# Altium PCB cs301_Group5_rev1--4_holes.PcbDoc
Units mil, origin at the board's own origin, x right, y up, seen from the top; angles counter-clockwise.
Board outline 10825 x 6635 mil, 2 copper layers (Top Layer, Bottom Layer); 97 components, 47 nets, 326 pads, 0 vias.
Unrouted connection lines stored in the file: 63.
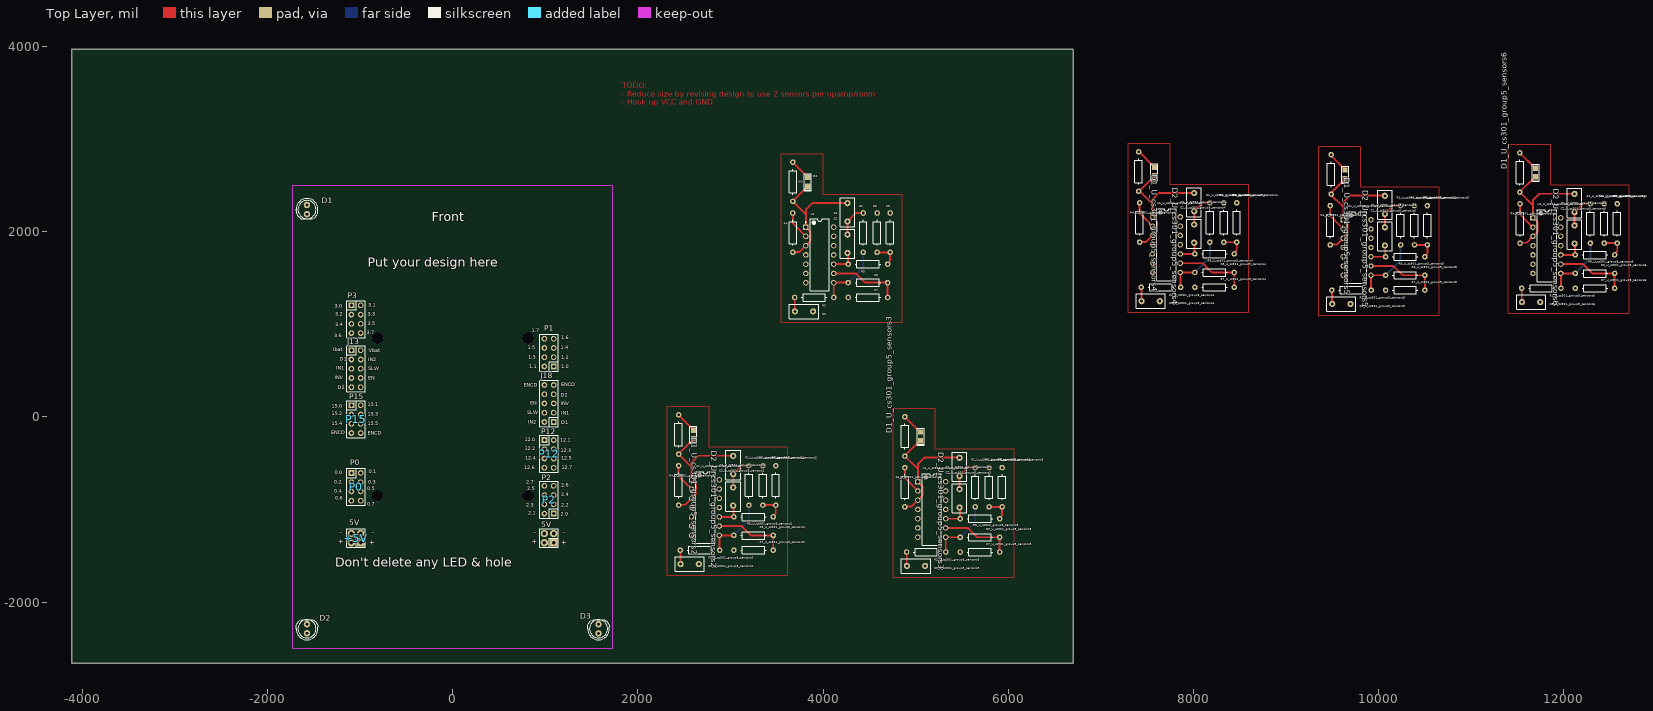
[diagram p0: Top Layer view]
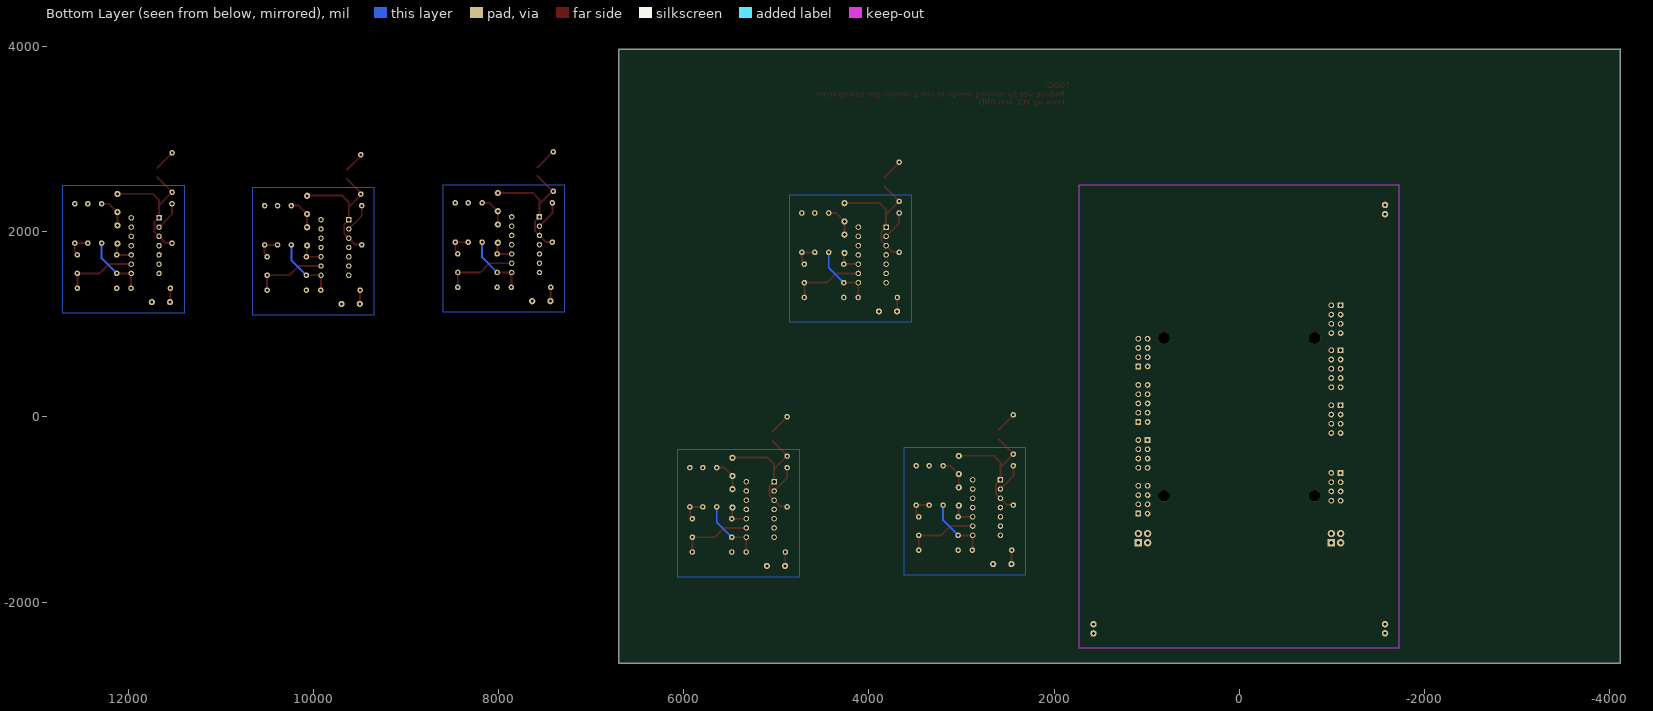
[diagram p1: Bottom Layer view, seen from below]

## Layer stack, top to bottom
Top Solder: solder mask 0.4, Solder Resist, Dk 3.5
Top Layer: signal copper 1.4
Dielectric1: dielectric 12.6, FR-4, Dk 4.8
Bottom Layer: signal copper 1.4
Bottom Solder: solder mask 0.4, Solder Resist, Dk 3.5

## Board outline
-4118.11,-2656.69 -4113.11,-2661.69 6701.89,-2661.69 6701.89,3973.31 -4123.11,3973.31 -4118.11,3968.31 -4118.11,-2656.69

## Design rules (kind name [scope] priority, off if disabled: settings)
Clearance [All] p1: gap=10 ignorepadtopadclearanceinfootprint=FALSE except(0: Arc-Hole Track-Hole SMDPad-Hole THPad-Hole Via-Hole Fill-Hole Poly-Hole Region-Hole Text-Hole)
PolygonConnect [All] p1: connectstyle=Relief reliefconductorwidth=20 reliefentries=4 polygonreliefangle="90 Angle" airgapwidth=10
RoomDefinition U_cs301_group5_sensors1 [InComponentClass('U_cs301_group5_sensors1')] p1: confinementstyle=ConfineIn formatcopy=TRUE lockcomponents=FALSE outline 3335,790 5085,790 5085,3100 3335,3100
RoomDefinition cs301_Group5 [InComponentClass('cs301_Group5')] p2: confinementstyle=ConfineIn formatcopy=TRUE lockcomponents=FALSE outline -5118.11,-3656.69 -3118.11,-3656.69 -3118.11,-2656.69 -5118.11,-2656.69
RoomDefinition U_cs301_group5_sensors2 [InComponentClass('U_cs301_group5_sensors2')] p3: confinementstyle=ConfineIn formatcopy=TRUE lockcomponents=FALSE outline 2100,-1940 3850,-1940 3850,370 2100,370
RoomDefinition U_cs301_group5_sensors3 [InComponentClass('U_cs301_group5_sensors3')] p4: confinementstyle=ConfineIn formatcopy=TRUE lockcomponents=FALSE outline 4545,-1960 6295,-1960 6295,350 4545,350
RoomDefinition U_cs301_group5_sensors4 [InComponentClass('U_cs301_group5_sensors4')] p5: confinementstyle=ConfineIn formatcopy=TRUE lockcomponents=FALSE outline 7080,900 8830,900 8830,3210 7080,3210
RoomDefinition U_cs301_group5_sensors5 [InComponentClass('U_cs301_group5_sensors5')] p6: confinementstyle=ConfineIn formatcopy=TRUE lockcomponents=FALSE outline 9140,870 10890,870 10890,3180 9140,3180
RoomDefinition U_cs301_group5_sensors6 [InComponentClass('U_cs301_group5_sensors6')] p7: confinementstyle=ConfineIn formatcopy=TRUE lockcomponents=FALSE outline 11190,890 12940,890 12940,3200 11190,3200
RoutingVias [All] p1: holewidth=28 width=50 viastyle="Through Hole" minholewidth=28 minwidth=50 maxholewidth=28 maxwidth=50
SilkToSolderMaskClearance SilkscreenOverComponentPads [IsPad] p1: minsilkscreentomaskgap=10 clearancetoexposedcopper=TRUE
SolderMaskExpansion [All] p1: expansion=4 istentingtop=FALSE
Width [All] p1: maxlimit=30 minlimit=10 preferedwidth=10 minimp=50.000000 maximp=50.000000 favimp=50.000000
29 further rules are at their usual default settings.

## Classes and differential pairs
channel class cs301_group5_sensors: U_cs301_group5_sensors1 U_cs301_group5_sensors2 U_cs301_group5_sensors3 U_cs301_group5_sensors4 U_cs301_group5_sensors5 U_cs301_group5_sensors6
component class U_cs301_group5_sensors6: C1_U_cs301_group5_sensors6 C2_U_cs301_group5_sensors6 C3_U_cs301_group5_sensors6 D1_U_cs301_group5_sensors6 D2_U_cs301_group5_sensors6 R1_U_cs301_group5_sensors6 R2_U_cs301_group5_sensors6 R3_U_cs301_group5_sensors6 R4_U_cs301_group5_sensors6 R5_U_cs301_group5_sensors6 R6_U_cs301_group5_sensors6 R7_U_cs301_group5_sensors6 R8_U_cs301_group5_sensors6 U1_U_cs301_group5_sensors6
component class U_cs301_group5_sensors5: C1_U_cs301_group5_sensors5 C2_U_cs301_group5_sensors5 C3_U_cs301_group5_sensors5 D1_U_cs301_group5_sensors5 D2_U_cs301_group5_sensors5 R1_U_cs301_group5_sensors5 R2_U_cs301_group5_sensors5 R3_U_cs301_group5_sensors5 R4_U_cs301_group5_sensors5 R5_U_cs301_group5_sensors5 R6_U_cs301_group5_sensors5 R7_U_cs301_group5_sensors5 R8_U_cs301_group5_sensors5 U1_U_cs301_group5_sensors5
component class U_cs301_group5_sensors4: C1_U_cs301_group5_sensors4 C2_U_cs301_group5_sensors4 C3_U_cs301_group5_sensors4 D1_U_cs301_group5_sensors4 D2_U_cs301_group5_sensors4 R1_U_cs301_group5_sensors4 R2_U_cs301_group5_sensors4 R3_U_cs301_group5_sensors4 R4_U_cs301_group5_sensors4 R5_U_cs301_group5_sensors4 R6_U_cs301_group5_sensors4 R7_U_cs301_group5_sensors4 R8_U_cs301_group5_sensors4 U1_U_cs301_group5_sensors4
component class U_cs301_group5_sensors3: C1_U_cs301_group5_sensors3 C2_U_cs301_group5_sensors3 C3_U_cs301_group5_sensors3 D1_U_cs301_group5_sensors3 D2_U_cs301_group5_sensors3 R1_U_cs301_group5_sensors3 R2_U_cs301_group5_sensors3 R3_U_cs301_group5_sensors3 R4_U_cs301_group5_sensors3 R5_U_cs301_group5_sensors3 R6_U_cs301_group5_sensors3 R7_U_cs301_group5_sensors3 R8_U_cs301_group5_sensors3 U1_U_cs301_group5_sensors3
component class U_cs301_group5_sensors2: C1_U_cs301_group5_sensors2 C2_U_cs301_group5_sensors2 C3_U_cs301_group5_sensors2 D1_U_cs301_group5_sensors2 D2_U_cs301_group5_sensors2 R1_U_cs301_group5_sensors2 R2_U_cs301_group5_sensors2 R3_U_cs301_group5_sensors2 R4_U_cs301_group5_sensors2 R5_U_cs301_group5_sensors2 R6_U_cs301_group5_sensors2 R7_U_cs301_group5_sensors2 R8_U_cs301_group5_sensors2 U1_U_cs301_group5_sensors2
component class U_cs301_group5_sensors1: C1 C2 C3 D1 D2 R1 R2 R3 R4 R5 R6 R7 R8 U1

## Components (designator, comment, footprint, x,y, rotation, side; value= is the part's Value field where it differs from the comment)
5V "5V" IDC4 1090,-1360 r90 top locked
+5V "5V" IDC4 -995,-1360 r90 top locked
C1 "12nF" CCAP-5P0 4265,2210 r270 top
C1_U_cs301_group5_sensors2 "12nF" CCAP-5P0 3030,-520 r270 top (schematic designator C1)
C1_U_cs301_group5_sensors3 "12nF" CCAP-5P0 5475,-540 r270 top (schematic designator C1)
C1_U_cs301_group5_sensors4 "12nF" CCAP-5P0 8010,2320 r270 top (schematic designator C1)
C1_U_cs301_group5_sensors5 "12nF" CCAP-5P0 10070,2290 r270 top (schematic designator C1)
C1_U_cs301_group5_sensors6 "12nF" CCAP-5P0 12120,2310 r270 top (schematic designator C1)
C2 "12nF" CCAP-5P0 4265,1870 r270 top
C2_U_cs301_group5_sensors2 "12nF" CCAP-5P0 3030,-860 r270 top (schematic designator C2)
C2_U_cs301_group5_sensors3 "12nF" CCAP-5P0 5475,-880 r270 top (schematic designator C2)
C2_U_cs301_group5_sensors4 "12nF" CCAP-5P0 8010,1980 r270 top (schematic designator C2)
C2_U_cs301_group5_sensors5 "12nF" CCAP-5P0 10070,1950 r270 top (schematic designator C2)
C2_U_cs301_group5_sensors6 "12nF" CCAP-5P0 12120,1970 r270 top (schematic designator C2)
C3 "100nF" CCAP-5P0 3795,1140 r0 top
C3_U_cs301_group5_sensors2 "100nF" CCAP-5P0 2560,-1590 r0 top (schematic designator C3)
C3_U_cs301_group5_sensors3 "100nF" CCAP-5P0 5005,-1610 r0 top (schematic designator C3)
C3_U_cs301_group5_sensors4 "100nF" CCAP-5P0 7540,1250 r0 top (schematic designator C3)
C3_U_cs301_group5_sensors5 "100nF" CCAP-5P0 9600,1220 r0 top (schematic designator C3)
C3_U_cs301_group5_sensors6 "100nF" CCAP-5P0 11650,1240 r0 top (schematic designator C3)
D1 "SM TEMT6200 placeholder" AXIAL-0.4 3675,2540 r90 top
D1 "LED_S" LED0.1/5MM#1 -1574.8,2189.76 r180 top locked
D1_U_cs301_group5_sensors2 "SM TEMT6200 placeholder" AXIAL-0.4 2440,-190 r90 top (schematic designator D1)
D1_U_cs301_group5_sensors3 "SM TEMT6200 placeholder" AXIAL-0.4 4884.5,-210.5 r270 top (schematic designator D1)
D1_U_cs301_group5_sensors4 "SM TEMT6200 placeholder" AXIAL-0.4 7410,2650 r90 top (schematic designator D1)
D1_U_cs301_group5_sensors5 "SM TEMT6200 placeholder" AXIAL-0.4 9490,2620 r90 top (schematic designator D1)
D1_U_cs301_group5_sensors6 "SM TEMT6200 placeholder" AXIAL-0.4 11528.43,2640 r270 top (schematic designator D1)
D2 "TEMT6200FX01" "0805 LED" 3835,2540 r270 top
D2 "LED_S" LED0.1/5MM#2 -1574.8,-2239.37 r0 top locked
D2_U_cs301_group5_sensors2 "TEMT6200FX01" "0805 LED" 2600,-190 r270 top (schematic designator D2)
D2_U_cs301_group5_sensors3 "TEMT6200FX01" "0805 LED" 5054.5,-210.5 r270 top (schematic designator D2)
D2_U_cs301_group5_sensors4 "TEMT6200FX01" "0805 LED" 7580,2650 r270 top (schematic designator D2)
D2_U_cs301_group5_sensors5 "TEMT6200FX01" "0805 LED" 9640,2620 r270 top (schematic designator D2)
D2_U_cs301_group5_sensors6 "TEMT6200FX01" "0805 LED" 11698.43,2640 r270 top (schematic designator D2)
D3 "LED_S" LED0.1/5MM#1 1574.8,-2239.37 r0 top locked
J13 "CON10" IDC10 -1095,720 r270 top locked
J18 "CON10" IDC10 1090,-55 r90 top locked
P0 "P0" idc8 -1095,-605 r270 top locked
P1 "P1" idc8 1090,545 r90 top locked
P2 "P2" idc8 1090,-1045 r90 top locked
P3 "P3" idc8 -1095,1205 r270 top locked
P12 "P12" idc8 990,-250 r270 top locked
P15 "P15" IDC8 -1095,125 r270 top locked
R1 "100k" AXIAL-0.4 4435,1990 r270 top
R1_U_cs301_group5_sensors2 "100k" AXIAL-0.4 3200,-740 r270 top (schematic designator R1)
R1_U_cs301_group5_sensors3 "100k" AXIAL-0.4 5645,-760 r270 top (schematic designator R1)
R1_U_cs301_group5_sensors4 "100k" AXIAL-0.4 8180,2100 r270 top (schematic designator R1)
R1_U_cs301_group5_sensors5 "100k" AXIAL-0.4 10240,2070 r270 top (schematic designator R1)
R1_U_cs301_group5_sensors6 "100k" AXIAL-0.4 12290,2090 r270 top (schematic designator R1)
R2 "820" AXIAL-0.4 3905,1290 r0 top
R2_U_cs301_group5_sensors2 "820" AXIAL-0.4 2670,-1440 r0 top (schematic designator R2)
R2_U_cs301_group5_sensors3 "820" AXIAL-0.4 5115,-1460 r0 top (schematic designator R2)
R2_U_cs301_group5_sensors4 "820" AXIAL-0.4 7650,1400 r0 top (schematic designator R2)
R2_U_cs301_group5_sensors5 "820" AXIAL-0.4 9710,1370 r0 top (schematic designator R2)
R2_U_cs301_group5_sensors6 "820" AXIAL-0.4 11760,1390 r0 top (schematic designator R2)
R3 "10k" AXIAL-0.4 4485,1450 r180 top
R3_U_cs301_group5_sensors2 "10k" AXIAL-0.4 3250,-1280 r180 top (schematic designator R3)
R3_U_cs301_group5_sensors3 "10k" AXIAL-0.4 5695,-1300 r180 top (schematic designator R3)
R3_U_cs301_group5_sensors4 "10k" AXIAL-0.4 8230,1560 r180 top (schematic designator R3)
R3_U_cs301_group5_sensors5 "10k" AXIAL-0.4 10290,1530 r180 top (schematic designator R3)
R3_U_cs301_group5_sensors6 "10k" AXIAL-0.4 12340,1550 r180 top (schematic designator R3)
R4 "100k" AXIAL-0.4 3675,1990 r270 top
R4_U_cs301_group5_sensors2 "100k" AXIAL-0.4 2440,-740 r270 top (schematic designator R4)
R4_U_cs301_group5_sensors3 "100k" AXIAL-0.4 4885,-760 r270 top (schematic designator R4)
R4_U_cs301_group5_sensors4 "100k" AXIAL-0.4 7420,2100 r270 top (schematic designator R4)
R4_U_cs301_group5_sensors5 "100k" AXIAL-0.4 9480,2070 r270 top (schematic designator R4)
R4_U_cs301_group5_sensors6 "100k" AXIAL-0.4 11530,2090 r270 top (schematic designator R4)
R5 "100k" AXIAL-0.4 4485,1650 r180 top
R5_U_cs301_group5_sensors2 "100k" AXIAL-0.4 3250,-1080 r180 top (schematic designator R5)
R5_U_cs301_group5_sensors3 "100k" AXIAL-0.4 5695,-1100 r180 top (schematic designator R5)
R5_U_cs301_group5_sensors4 "100k" AXIAL-0.4 8230,1760 r180 top (schematic designator R5)
R5_U_cs301_group5_sensors5 "100k" AXIAL-0.4 10290,1730 r180 top (schematic designator R5)
R5_U_cs301_group5_sensors6 "100k" AXIAL-0.4 12340,1750 r180 top (schematic designator R5)
R6 "330k" AXIAL-0.4 4585,1990 r90 top
R6_U_cs301_group5_sensors2 "330k" AXIAL-0.4 3350,-740 r90 top (schematic designator R6)
R6_U_cs301_group5_sensors3 "330k" AXIAL-0.4 5795,-760 r90 top (schematic designator R6)
R6_U_cs301_group5_sensors4 "330k" AXIAL-0.4 8330,2100 r90 top (schematic designator R6)
R6_U_cs301_group5_sensors5 "330k" AXIAL-0.4 10390,2070 r90 top (schematic designator R6)
R6_U_cs301_group5_sensors6 "330k" AXIAL-0.4 12440,2090 r90 top (schematic designator R6)
R7 "10k" AXIAL-0.4 4485,1290 r0 top
R7_U_cs301_group5_sensors2 "10k" AXIAL-0.4 3250,-1440 r0 top (schematic designator R7)
R7_U_cs301_group5_sensors3 "10k" AXIAL-0.4 5695,-1460 r0 top (schematic designator R7)
R7_U_cs301_group5_sensors4 "10k" AXIAL-0.4 8230,1400 r0 top (schematic designator R7)
R7_U_cs301_group5_sensors5 "10k" AXIAL-0.4 10290,1370 r0 top (schematic designator R7)
R7_U_cs301_group5_sensors6 "10k" AXIAL-0.4 12340,1390 r0 top (schematic designator R7)
R8 "39k" AXIAL-0.4 4725,1990 r270 top
R8_U_cs301_group5_sensors2 "39k" AXIAL-0.4 3490,-740 r270 top (schematic designator R8)
R8_U_cs301_group5_sensors3 "39k" AXIAL-0.4 5935,-760 r270 top (schematic designator R8)
R8_U_cs301_group5_sensors4 "39k" AXIAL-0.4 8470,2100 r270 top (schematic designator R8)
R8_U_cs301_group5_sensors5 "39k" AXIAL-0.4 10530,2070 r270 top (schematic designator R8)
R8_U_cs301_group5_sensors6 "39k" AXIAL-0.4 12580,2090 r270 top (schematic designator R8)
U1 "LF347N" N0014A 3965,1750 r0 top
U1_U_cs301_group5_sensors2 "LF347N" N0014A 2730,-980 r0 top (schematic designator U1)
U1_U_cs301_group5_sensors3 "LF347N" N0014A 5175,-1000 r0 top (schematic designator U1)
U1_U_cs301_group5_sensors4 "LF347N" N0014A 7710,1860 r0 top (schematic designator U1)
U1_U_cs301_group5_sensors5 "LF347N" N0014A 9770,1830 r0 top (schematic designator U1)
U1_U_cs301_group5_sensors6 "LF347N" N0014A 11820,1850 r0 top (schematic designator U1)

## Footprints (in the part's own frame and the unit in brackets; to place one, negate y for a bottom-side part, rotate by r counter-clockwise, add the part's x,y. Pads: shape width x height; smd on the part's side, far side on the other; paste and mask are expansions set on the pad)
"0805 LED" [mm] "RED AS AlGaAs SMD LED, Body; 2mm x 1.25 mm (LxW)"
  rect 1.5x1.4 smd: 1(-1.2,0) 2(1.2,0)
  silkscreen extent -2.2,-0.95 2.45,0.95, body extent -1,-0.63 1,0.63, height 1.1
AXIAL-0.4 [mil]
  round 60 hole 27.56: 1(-212.6,0) 2(212.6,0)
  silkscreen extent -138,-40 138,40, body extent -224,-51 224,51, height 106
CCAP-5P0 [mm]
  round 1.7 hole 0.8: 1(-2.5,0) 2(2.5,0)
  silkscreen extent -4,-2 4,2, body extent -3.25,-1.5 3.25,1.5, height 6.5
IDC4 [mil]
  rect 80x80 hole 40: 1(0,0)
  round 80 hole 40: 2(0,100) 3(100,0) 4(100,100)
  silkscreen extent -50,-50 150,150
idc8 [mil]
  rect 62x62 hole 35: 1(0,0)
  round 62 hole 35: 2(0,100) 3(100,0) 4(100,100) 5(200,0) 6(200,100) 7(300,0) 8(300,100)
  silkscreen extent -50,-50 350,150
IDC8 [mil]
  rect 62x62 hole 35: 1(0,0)
  round 62 hole 35: 2(0,100) 3(100,0) 4(100,100) 5(200,0) 6(200,100) 7(300,0) 8(300,100)
  silkscreen extent -50,-50 350,150
IDC10 [mil]
  rect 62x62 hole 35: 1(0,0)
  round 62 hole 35: 2(0,100) 3(100,0) 4(100,100) 5(200,0) 6(200,100) 7(300,0) 8(300,100) 9(400,0) 10(400,100)
  silkscreen extent -50,-50 450,150
LED0.1/5MM#1 [mil]
  round 70 hole 30: A(0,0) K(0,-100)
  silkscreen extent -118,-168 118,50
LED0.1/5MM#2 [mil]
  round 70 hole 30: A(0,0) K(0,-98.43)
  silkscreen extent -118,-168 118,50
N0014A [mm] "DIP, 14-Leads, Body 19.7x6.6mm, Pitch 2.54mm"
  rect 1.5x1.5 hole 0.9: 1(-3.81,7.62)
  round 1.5 hole 0.9: 2(-3.81,5.08) 3(-3.81,2.54) 4(-3.81,0) 5(-3.81,-2.54) 6(-3.81,-5.08) 7(-3.81,-7.62) 8(3.81,-7.62) 9(3.81,-5.08) 10(3.81,-2.54) 11(3.81,0) 12(3.81,2.54) 13(3.81,5.08) 14(3.81,7.62)
  silkscreen extent -3.93,-9.85 2.65,9.85, body extent -3.95,-9.85 3.95,9.85, height 5.08

## Part data
5V +5V: library part CON4, "Connector"
C1 C1_U_cs301_group5_sensors2 C1_U_cs301_group5_sensors3 C1_U_cs301_group5_sensors4 C1_U_cs301_group5_sensors5 C1_U_cs301_group5_sensors6 C2 C2_U_cs301_group5_sensors2 C2_U_cs301_group5_sensors3 C2_U_cs301_group5_sensors4 C2_U_cs301_group5_sensors5 C2_U_cs301_group5_sensors6 C3 C3_U_cs301_group5_sensors2 C3_U_cs301_group5_sensors3 C3_U_cs301_group5_sensors4 C3_U_cs301_group5_sensors5 C3_U_cs301_group5_sensors6: library part CerCap_TH_5P0, "SMT ceramic capacitor 0805 size"
D1 D1_U_cs301_group5_sensors2 D1_U_cs301_group5_sensors3 D1_U_cs301_group5_sensors4 D1_U_cs301_group5_sensors5 D1_U_cs301_group5_sensors6: library part Res_TH_0AX4, ComponentLink1Description=http://www.royalohm.com/pdf/product2017/PrecisionMetalMF.pdf, LatestRevisionDate=17-Jul-2002, LatestRevisionNote="Re-released for DXP Platform.", PackageReference=AXIAL-0.4, Published=8-Jun-2000, Publisher="Altium Limited"
D1 D2 D3: library part LED
D2 D2_U_cs301_group5_sensors2 D2_U_cs301_group5_sensors3 D2_U_cs301_group5_sensors4 D2_U_cs301_group5_sensors5 D2_U_cs301_group5_sensors6: library part LED_SMT_0805, "SMT LED 0805 size", Color=Green, Current - Test=20mA, Lens Color=Colorless, Manufacturer="Lite-On Inc.", Manufacturer Part Number=LTST-C170KGKT, Millicandela Rating=35mcd, Package / Case="0805 (2012 Metric)", Supplier Part Number 1=160-1414-1-ND, Voltage - Forward (Vf) (Typ)=2V, Category=Optoelectronics, ComponentLink1Description=http://optoelectronics.liteon.com/upload/download/DS22-2000-073/LTST-C170KGKT.pdf, ComponentLink1URL=http://optoelectronics.liteon.com/upload/download/DS22-2000-073/LTST-C170KGKT.pdf, Features=-, Height (Max)=1.10mm, Lens Style/Size="Rectangle with Flat Top, 1.40mm x 1.25mm", Lens Transparency=Clear, Mounting Type="Surface Mount", Packaging="Cut Tape (CT)", Part Status=Active, Pricing 1="1=0.62, 10=0.459, 25=0.338, 100=0.2415, 250=0.16416, 500=0.14486, 1000=0.11347 (NZD)", RoHS="RoHS Compliant", Size / Dimension="2.00mm L x 1.25mm W", Stock 1=503069, Supplier 1=Digi-Key, Supplier 2=RSComponents, Viewing Angle=130°, Wavelength - Dominant=571nm, Wavelength - Peak=574nm
J13 J18: "Connector"
P0 P1 P2 P3: library part CON8, "Connector"
P12 P15: library part CON8_1, "Connector"
R1 R1_U_cs301_group5_sensors2 R1_U_cs301_group5_sensors3 R1_U_cs301_group5_sensors4 R1_U_cs301_group5_sensors5 R1_U_cs301_group5_sensors6 R2 R2_U_cs301_group5_sensors2 R2_U_cs301_group5_sensors3 R2_U_cs301_group5_sensors4 R2_U_cs301_group5_sensors5 R2_U_cs301_group5_sensors6 R3 R3_U_cs301_group5_sensors2 R3_U_cs301_group5_sensors3 R3_U_cs301_group5_sensors4 R3_U_cs301_group5_sensors5 R3_U_cs301_group5_sensors6 R4 R4_U_cs301_group5_sensors2 R4_U_cs301_group5_sensors3 R4_U_cs301_group5_sensors4 R4_U_cs301_group5_sensors5 R4_U_cs301_group5_sensors6 R5 R5_U_cs301_group5_sensors2 R5_U_cs301_group5_sensors3 R5_U_cs301_group5_sensors4 R5_U_cs301_group5_sensors5 R5_U_cs301_group5_sensors6 R6 R6_U_cs301_group5_sensors2 R6_U_cs301_group5_sensors3 R6_U_cs301_group5_sensors4 R6_U_cs301_group5_sensors5 R6_U_cs301_group5_sensors6 R7 R7_U_cs301_group5_sensors2 R7_U_cs301_group5_sensors3 R7_U_cs301_group5_sensors4 R7_U_cs301_group5_sensors5 R7_U_cs301_group5_sensors6 R8 R8_U_cs301_group5_sensors2 R8_U_cs301_group5_sensors3 R8_U_cs301_group5_sensors4 R8_U_cs301_group5_sensors5 R8_U_cs301_group5_sensors6: library part Res_TH_0AX4, "Through hole resistor", ComponentLink1Description=http://www.royalohm.com/pdf/product2017/PrecisionMetalMF.pdf, LatestRevisionDate=17-Jul-2002, LatestRevisionNote="Re-released for DXP Platform.", PackageReference=AXIAL-0.4, Published=8-Jun-2000, Publisher="Altium Limited"
U1 U1_U_cs301_group5_sensors2 U1_U_cs301_group5_sensors3 U1_U_cs301_group5_sensors4 U1_U_cs301_group5_sensors5 U1_U_cs301_group5_sensors6: library part CMP-0055-00229-3, "Wide Bandwidth Quad JFET Input Operational Amplifier, 14-pin MDIP", Manufacturer="Texas Instruments", Package Reference=N0014A, PackageTopMarking=NSUZXYYTTE#*LF347N, PowerWise=N, Code_JEDEC=MS-001-AA, ComponentLink1Description="Datasheet URL", ComponentLink1URL=http://www.ti.com/general/docs/lit/getliterature.tsp?genericPartNumber=LF347&fileType=pdf, CompType=Amplifiers, PackageDescription="MDIP, .750 x .250 x.130in, 14 Lead, .100in Pitch", PinCount=14, RoHS=N

## Free pads (board coordinates)
  round 125.98 hole 125.98 unplated: 1(-813,-853) 1(-813,853) 1(813,-853) 1(813,853)

## Nets (pads, with @x,y where several pads share a name; then routed paths per layer and width w, separated by ;. In a path a pad name is that pad's centre, name@x,y a point inside that pad or via, vN(x,y) a via of type N, cw(c..) or ccw(c..) an arc to the next point about the centre after c; other vN are vias at no path point)
ADC1: C3_U_cs301_group5_sensors6.1 P1.8 R2_U_cs301_group5_sensors6.1 | length 131.7
  Top Layer w20: R2_U_cs301_group5_sensors6.1 11549.49,1387.91 11549.49,1262.09 C3_U_cs301_group5_sensors6.1@11551.57,1260
ADC2: C3_U_cs301_group5_sensors5.1 P1.7 R2_U_cs301_group5_sensors5.1 | length 131.7
  Top Layer w20: R2_U_cs301_group5_sensors5.1 9499.49,1367.91 9499.49,1242.09 C3_U_cs301_group5_sensors5.1@9501.57,1240
ADC3: C3_U_cs301_group5_sensors4.1 P1.5 P1.6 R2_U_cs301_group5_sensors4.1 | length 131.7
  Top Layer w20: R2_U_cs301_group5_sensors4.1 7439.49,1397.91 7439.49,1272.09 C3_U_cs301_group5_sensors4.1@7441.57,1270
ADC4: C3_U_cs301_group5_sensors3.1 R2_U_cs301_group5_sensors3.1 | length 131.7
  Top Layer w20: R2_U_cs301_group5_sensors3.1 4904.49,-1462.09 4904.49,-1587.91 C3_U_cs301_group5_sensors3.1@4906.57,-1590
ADC5: C3_U_cs301_group5_sensors2.1 P1.3 R2_U_cs301_group5_sensors2.1 | length 131.7
  Top Layer w20: R2_U_cs301_group5_sensors2.1 2459.49,-1442.09 2459.49,-1567.91 C3_U_cs301_group5_sensors2.1@2461.57,-1570
ADC6: C3.1 R2.1 | length 131.7
  Top Layer w20: R2.1 3694.49,1287.91 3694.49,1162.09 C3.1@3696.57,1160
NetC1_U_cs301_group5_sensors1_1: C1.1 D1.1 D2.2 R4.2 U1.1 U1.3 | length 1513
  Top Layer w20: R4.2@3675,1780 R4.2 3678.17,1780.57 3745.57,1780.57 U1.3 3864.53,1899.53 3864.53,2000.47 U1.1 3815,2187.4 ; D2.2 3835,2490.79 3675,2330.79 D1.1 3815,2187.4 ; C1.1 4263.43,2310 3885,2310 3815,2240 3815,2187.4
NetC1_U_cs301_group5_sensors1_2: C1.2 C2.1 R1.1 | length 350.9
  Top Layer w20: C2.1 C1.2 4356.02,2202.6 R1.1
NetC1_U_cs301_group5_sensors2_1: C1_U_cs301_group5_sensors2.1 D1_U_cs301_group5_sensors2.1 D2_U_cs301_group5_sensors2.2 R4_U_cs301_group5_sensors2.2 U1_U_cs301_group5_sensors2.1 U1_U_cs301_group5_sensors2.3 | length 1513
  Top Layer w20: R4_U_cs301_group5_sensors2.2@2440,-950 R4_U_cs301_group5_sensors2.2 2443.17,-949.43 2510.57,-949.43 U1_U_cs301_group5_sensors2.3 2629.53,-830.47 2629.53,-729.53 U1_U_cs301_group5_sensors2.1 2580,-542.6 ; D2_U_cs301_group5_sensors2.2 2600,-239.21 2440,-399.21 D1_U_cs301_group5_sensors2.1 2580,-542.6 ; C1_U_cs301_group5_sensors2.1 3028.43,-420 2650,-420 2580,-490 2580,-542.6
NetC1_U_cs301_group5_sensors2_2: C1_U_cs301_group5_sensors2.2 C2_U_cs301_group5_sensors2.1 R1_U_cs301_group5_sensors2.1 | length 350.9
  Top Layer w20: C2_U_cs301_group5_sensors2.1 C1_U_cs301_group5_sensors2.2 3121.02,-527.4 R1_U_cs301_group5_sensors2.1
NetC1_U_cs301_group5_sensors3_1: C1_U_cs301_group5_sensors3.1 D1_U_cs301_group5_sensors3.1 D2_U_cs301_group5_sensors3.2 R4_U_cs301_group5_sensors3.2 U1_U_cs301_group5_sensors3.1 U1_U_cs301_group5_sensors3.3 | length 1513
  Top Layer w20: R4_U_cs301_group5_sensors3.2@4885,-970 R4_U_cs301_group5_sensors3.2 4888.17,-969.43 4955.57,-969.43 U1_U_cs301_group5_sensors3.3 5074.53,-850.47 5074.53,-749.53 U1_U_cs301_group5_sensors3.1 5025,-562.6 ; D2_U_cs301_group5_sensors3.2@5045,-257.24 5045,-259.21 4885,-419.21 4885,-422.6 5025,-562.6 ; C1_U_cs301_group5_sensors3.1 5473.43,-440 5095,-440 5025,-510 5025,-562.6
NetC1_U_cs301_group5_sensors3_2: C1_U_cs301_group5_sensors3.2 C2_U_cs301_group5_sensors3.1 R1_U_cs301_group5_sensors3.1 | length 350.9
  Top Layer w20: C2_U_cs301_group5_sensors3.1 C1_U_cs301_group5_sensors3.2 5566.02,-547.4 R1_U_cs301_group5_sensors3.1
NetC1_U_cs301_group5_sensors4_1: C1_U_cs301_group5_sensors4.1 D1_U_cs301_group5_sensors4.1 D2_U_cs301_group5_sensors4.2 R4_U_cs301_group5_sensors4.2 U1_U_cs301_group5_sensors4.1 U1_U_cs301_group5_sensors4.3 | length 1513
  Top Layer w20: R4_U_cs301_group5_sensors4.2@7420,1890 R4_U_cs301_group5_sensors4.2 7423.17,1890.57 7490.57,1890.57 U1_U_cs301_group5_sensors4.3 7609.53,2009.53 7609.53,2110.47 U1_U_cs301_group5_sensors4.1 7560,2297.4 ; D2_U_cs301_group5_sensors4.2 7580,2600.79 7420,2440.79 7420,2437.4 7560,2297.4 ; C1_U_cs301_group5_sensors4.1 8008.43,2420 7630,2420 7560,2350 7560,2297.4
NetC1_U_cs301_group5_sensors4_2: C1_U_cs301_group5_sensors4.2 C2_U_cs301_group5_sensors4.1 R1_U_cs301_group5_sensors4.1 | length 350.9
  Top Layer w20: C2_U_cs301_group5_sensors4.1 C1_U_cs301_group5_sensors4.2 8101.02,2312.6 R1_U_cs301_group5_sensors4.1
NetC1_U_cs301_group5_sensors5_1: C1_U_cs301_group5_sensors5.1 D1_U_cs301_group5_sensors5.1 D2_U_cs301_group5_sensors5.2 R4_U_cs301_group5_sensors5.2 U1_U_cs301_group5_sensors5.1 U1_U_cs301_group5_sensors5.3 | length 1513
  Top Layer w20: R4_U_cs301_group5_sensors5.2@9480,1860 R4_U_cs301_group5_sensors5.2 9483.17,1860.57 9550.57,1860.57 U1_U_cs301_group5_sensors5.3 9669.53,1979.53 9669.53,2080.47 U1_U_cs301_group5_sensors5.1 9620,2267.4 ; D2_U_cs301_group5_sensors5.2 9640,2570.79 9480,2410.79 9480,2407.4 9620,2267.4 ; C1_U_cs301_group5_sensors5.1 10068.43,2390 9690,2390 9620,2320 9620,2267.4
NetC1_U_cs301_group5_sensors5_2: C1_U_cs301_group5_sensors5.2 C2_U_cs301_group5_sensors5.1 R1_U_cs301_group5_sensors5.1 | length 350.9
  Top Layer w20: C2_U_cs301_group5_sensors5.1 C1_U_cs301_group5_sensors5.2 10161.02,2282.6 R1_U_cs301_group5_sensors5.1
NetC1_U_cs301_group5_sensors6_1: C1_U_cs301_group5_sensors6.1 D1_U_cs301_group5_sensors6.1 D2_U_cs301_group5_sensors6.2 R4_U_cs301_group5_sensors6.2 U1_U_cs301_group5_sensors6.1 U1_U_cs301_group5_sensors6.3 | length 1513
  Top Layer w20: R4_U_cs301_group5_sensors6.2@11530,1880 R4_U_cs301_group5_sensors6.2 11533.17,1880.57 11600.57,1880.57 U1_U_cs301_group5_sensors6.3 11719.53,1999.53 11719.53,2100.47 U1_U_cs301_group5_sensors6.1 11670,2287.4 ; D2_U_cs301_group5_sensors6.2@11690,2592.76 11690,2590.79 11530,2430.79 11530,2427.4 11670,2287.4 ; C1_U_cs301_group5_sensors6.1 12118.43,2410 11740,2410 11670,2340 11670,2287.4
NetC1_U_cs301_group5_sensors6_2: C1_U_cs301_group5_sensors6.2 C2_U_cs301_group5_sensors6.1 R1_U_cs301_group5_sensors6.1 | length 350.9
  Top Layer w20: C2_U_cs301_group5_sensors6.1 C1_U_cs301_group5_sensors6.2 12211.02,2302.6 R1_U_cs301_group5_sensors6.1
NetC2_U_cs301_group5_sensors1_2: C2.2 R5.2 U1.10 | length 282
  Top Layer w20: U1.10 R5.2 4268.7,1653.7 4268.7,1767.87 C2.2
NetC2_U_cs301_group5_sensors2_2: C2_U_cs301_group5_sensors2.2 R5_U_cs301_group5_sensors2.2 U1_U_cs301_group5_sensors2.10 | length 282
  Top Layer w20: U1_U_cs301_group5_sensors2.10 R5_U_cs301_group5_sensors2.2 3033.7,-1076.3 3033.7,-962.13 C2_U_cs301_group5_sensors2.2
NetC2_U_cs301_group5_sensors3_2: C2_U_cs301_group5_sensors3.2 R5_U_cs301_group5_sensors3.2 U1_U_cs301_group5_sensors3.10 | length 282
  Top Layer w20: U1_U_cs301_group5_sensors3.10 R5_U_cs301_group5_sensors3.2 5478.7,-1096.3 5478.7,-982.13 C2_U_cs301_group5_sensors3.2
NetC2_U_cs301_group5_sensors4_2: C2_U_cs301_group5_sensors4.2 R5_U_cs301_group5_sensors4.2 U1_U_cs301_group5_sensors4.10 | length 282
  Top Layer w20: U1_U_cs301_group5_sensors4.10 R5_U_cs301_group5_sensors4.2 8013.7,1763.7 8013.7,1877.87 C2_U_cs301_group5_sensors4.2
NetC2_U_cs301_group5_sensors5_2: C2_U_cs301_group5_sensors5.2 R5_U_cs301_group5_sensors5.2 U1_U_cs301_group5_sensors5.10 | length 282
  Top Layer w20: U1_U_cs301_group5_sensors5.10 R5_U_cs301_group5_sensors5.2 10073.7,1733.7 10073.7,1847.87 C2_U_cs301_group5_sensors5.2
NetC2_U_cs301_group5_sensors6_2: C2_U_cs301_group5_sensors6.2 R5_U_cs301_group5_sensors6.2 U1_U_cs301_group5_sensors6.10 | length 282
  Top Layer w20: U1_U_cs301_group5_sensors6.10 R5_U_cs301_group5_sensors6.2 12123.7,1753.7 12123.7,1867.87 C2_U_cs301_group5_sensors6.2
NetD1_A: D1.A
NetD2_A: D2.A
NetD3_A: D3.A
NetR1_U_cs301_group5_sensors1_2: R1.2 R2.2 R3.2 U1.8 | length 713.2
  Top Layer w20: R2.2 4116.3,1291.3 4116.3,1448.7 U1.8 R3.2
  Bottom Layer w20: R3.2 4435,1612.6 R1.2
NetR1_U_cs301_group5_sensors2_2: R1_U_cs301_group5_sensors2.2 R2_U_cs301_group5_sensors2.2 R3_U_cs301_group5_sensors2.2 U1_U_cs301_group5_sensors2.8 | length 713.2
  Top Layer w20: R2_U_cs301_group5_sensors2.2 2881.3,-1438.7 2881.3,-1281.3 U1_U_cs301_group5_sensors2.8 R3_U_cs301_group5_sensors2.2
  Bottom Layer w20: R3_U_cs301_group5_sensors2.2 3200,-1117.4 R1_U_cs301_group5_sensors2.2
NetR1_U_cs301_group5_sensors3_2: R1_U_cs301_group5_sensors3.2 R2_U_cs301_group5_sensors3.2 R3_U_cs301_group5_sensors3.2 U1_U_cs301_group5_sensors3.8 | length 713.2
  Top Layer w20: R2_U_cs301_group5_sensors3.2 5326.3,-1458.7 5326.3,-1301.3 U1_U_cs301_group5_sensors3.8 R3_U_cs301_group5_sensors3.2
  Bottom Layer w20: R3_U_cs301_group5_sensors3.2 5645,-1137.4 R1_U_cs301_group5_sensors3.2
NetR1_U_cs301_group5_sensors4_2: R1_U_cs301_group5_sensors4.2 R2_U_cs301_group5_sensors4.2 R3_U_cs301_group5_sensors4.2 U1_U_cs301_group5_sensors4.8 | length 713.2
  Top Layer w20: R2_U_cs301_group5_sensors4.2 7861.3,1401.3 7861.3,1558.7 U1_U_cs301_group5_sensors4.8 R3_U_cs301_group5_sensors4.2
  Bottom Layer w20: R3_U_cs301_group5_sensors4.2 8180,1722.6 R1_U_cs301_group5_sensors4.2
NetR1_U_cs301_group5_sensors5_2: R1_U_cs301_group5_sensors5.2 R2_U_cs301_group5_sensors5.2 R3_U_cs301_group5_sensors5.2 U1_U_cs301_group5_sensors5.8 | length 713.2
  Top Layer w20: R2_U_cs301_group5_sensors5.2 9921.3,1371.3 9921.3,1528.7 U1_U_cs301_group5_sensors5.8 R3_U_cs301_group5_sensors5.2
  Bottom Layer w20: R3_U_cs301_group5_sensors5.2 10240,1692.6 R1_U_cs301_group5_sensors5.2
NetR1_U_cs301_group5_sensors6_2: R1_U_cs301_group5_sensors6.2 R2_U_cs301_group5_sensors6.2 R3_U_cs301_group5_sensors6.2 U1_U_cs301_group5_sensors6.8 | length 713.2
  Top Layer w20: R2_U_cs301_group5_sensors6.2 11971.3,1391.3 11971.3,1548.7 U1_U_cs301_group5_sensors6.8 R3_U_cs301_group5_sensors6.2
  Bottom Layer w20: R3_U_cs301_group5_sensors6.2 12290,1712.6 R1_U_cs301_group5_sensors6.2
NetR3_U_cs301_group5_sensors1_1: R3.1 R7.2 U1.9 | length 784
  Top Layer w20: U1.9 4356.17,1550 4456.17,1450 R3.1 R7.2
NetR3_U_cs301_group5_sensors2_1: R3_U_cs301_group5_sensors2.1 R7_U_cs301_group5_sensors2.2 U1_U_cs301_group5_sensors2.9 | length 784
  Top Layer w20: U1_U_cs301_group5_sensors2.9 3121.17,-1180 3221.17,-1280 R3_U_cs301_group5_sensors2.1 R7_U_cs301_group5_sensors2.2
NetR3_U_cs301_group5_sensors3_1: R3_U_cs301_group5_sensors3.1 R7_U_cs301_group5_sensors3.2 U1_U_cs301_group5_sensors3.9 | length 784
  Top Layer w20: U1_U_cs301_group5_sensors3.9 5566.17,-1200 5666.17,-1300 R3_U_cs301_group5_sensors3.1 R7_U_cs301_group5_sensors3.2
NetR3_U_cs301_group5_sensors4_1: R3_U_cs301_group5_sensors4.1 R7_U_cs301_group5_sensors4.2 U1_U_cs301_group5_sensors4.9 | length 784
  Top Layer w20: U1_U_cs301_group5_sensors4.9 8101.17,1660 8201.17,1560 R3_U_cs301_group5_sensors4.1 R7_U_cs301_group5_sensors4.2
NetR3_U_cs301_group5_sensors5_1: R3_U_cs301_group5_sensors5.1 R7_U_cs301_group5_sensors5.2 U1_U_cs301_group5_sensors5.9 | length 784
  Top Layer w20: U1_U_cs301_group5_sensors5.9 10161.17,1630 10261.17,1530 R3_U_cs301_group5_sensors5.1 R7_U_cs301_group5_sensors5.2
NetR3_U_cs301_group5_sensors6_1: R3_U_cs301_group5_sensors6.1 R7_U_cs301_group5_sensors6.2 U1_U_cs301_group5_sensors6.9 | length 784
  Top Layer w20: U1_U_cs301_group5_sensors6.9 12211.17,1650 12311.17,1550 R3_U_cs301_group5_sensors6.1 R7_U_cs301_group5_sensors6.2
V_GND_U_cs301_group5_sensors1: 5V.3 5V.4 +5V.3 +5V.4 C3.2 C3_U_cs301_group5_sensors2.2 C3_U_cs301_group5_sensors3.2 C3_U_cs301_group5_sensors4.2 C3_U_cs301_group5_sensors5.2 C3_U_cs301_group5_sensors6.2 R4.1 R4_U_cs301_group5_sensors2.1 R4_U_cs301_group5_sensors3.1 R4_U_cs301_group5_sensors4.1 R4_U_cs301_group5_sensors5.1 R4_U_cs301_group5_sensors6.1 R7.1 R7_U_cs301_group5_sensors2.1 R7_U_cs301_group5_sensors3.1 R7_U_cs301_group5_sensors4.1 R7_U_cs301_group5_sensors5.1 R7_U_cs301_group5_sensors6.1 R8.1 R8_U_cs301_group5_sensors2.1 R8_U_cs301_group5_sensors3.1 R8_U_cs301_group5_sensors4.1 R8_U_cs301_group5_sensors5.1 R8_U_cs301_group5_sensors6.1 U1.2 U1.11 U1_U_cs301_group5_sensors2.2 U1_U_cs301_group5_sensors2.11 U1_U_cs301_group5_sensors3.2 U1_U_cs301_group5_sensors3.11 U1_U_cs301_group5_sensors4.2 U1_U_cs301_group5_sensors4.11 U1_U_cs301_group5_sensors5.2 U1_U_cs301_group5_sensors5.11 U1_U_cs301_group5_sensors6.2 U1_U_cs301_group5_sensors6.11 | length 1863.5
  Top Layer w20: R4_U_cs301_group5_sensors2.1 2440,-640 U1_U_cs301_group5_sensors2.2 ; R4.1 3675,2090 U1.2 ; R4_U_cs301_group5_sensors3.1 4885,-660 U1_U_cs301_group5_sensors3.2 ; R4_U_cs301_group5_sensors4.1 7420,2200 U1_U_cs301_group5_sensors4.2 ; R4_U_cs301_group5_sensors5.1 9480,2170 U1_U_cs301_group5_sensors5.2 ; R4_U_cs301_group5_sensors6.1 11530,2190 U1_U_cs301_group5_sensors6.2
V_VCC_U_cs301_group5_sensors1: 5V.1 5V.2 +5V.1 +5V.2 D1.2 D1_U_cs301_group5_sensors2.2 D1_U_cs301_group5_sensors3.2 D1_U_cs301_group5_sensors4.2 D1_U_cs301_group5_sensors5.2 D1_U_cs301_group5_sensors6.2 D2.1 D2_U_cs301_group5_sensors2.1 D2_U_cs301_group5_sensors3.1 D2_U_cs301_group5_sensors4.1 D2_U_cs301_group5_sensors5.1 D2_U_cs301_group5_sensors6.1 R6.2 R6_U_cs301_group5_sensors2.2 R6_U_cs301_group5_sensors3.2 R6_U_cs301_group5_sensors4.2 R6_U_cs301_group5_sensors5.2 R6_U_cs301_group5_sensors6.2 U1.4 U1_U_cs301_group5_sensors2.4 U1_U_cs301_group5_sensors3.4 U1_U_cs301_group5_sensors4.4 U1_U_cs301_group5_sensors5.4 U1_U_cs301_group5_sensors6.4 | length 1621.4
  Top Layer w20: D1_U_cs301_group5_sensors2.2 2440,19.21 2600,-140.79 D2_U_cs301_group5_sensors2.1 ; D1.2 3675,2749.21 3835,2589.21 D2.1 ; 4885,2.6 4885,-0.79 5045,-160.79 D2_U_cs301_group5_sensors3.1@5045,-162.76 ; D1_U_cs301_group5_sensors4.2@7420,2862.6 7420,2859.21 7580,2699.21 D2_U_cs301_group5_sensors4.1 ; D1_U_cs301_group5_sensors5.2@9480,2832.6 9480,2829.21 9640,2669.21 D2_U_cs301_group5_sensors5.1 ; 11530,2849.21 D2_U_cs301_group5_sensors6.1@11690,2689.21 ; 11530,2849.21 11530,2852.6 11530,2849.21 ; 11530,2849.21 D2_U_cs301_group5_sensors6.1@11690,2689.21 ; D2_U_cs301_group5_sensors6.1@11690,2689.21 11690,2687.24 D2_U_cs301_group5_sensors6.1@11690,2689.21
Voffset_U_cs301_group5_sensors1: R5.1 R6.1 R8.2 | length 278.8
  Top Layer w20: R6.1 R8.2 4725,1688.23 4697.6,1660.82 R5.1
Voffset_U_cs301_group5_sensors2: R5_U_cs301_group5_sensors2.1 R6_U_cs301_group5_sensors2.1 R8_U_cs301_group5_sensors2.2 | length 278.8
  Top Layer w20: R6_U_cs301_group5_sensors2.1 R8_U_cs301_group5_sensors2.2 3490,-1041.77 3462.6,-1069.18 R5_U_cs301_group5_sensors2.1
Voffset_U_cs301_group5_sensors3: R5_U_cs301_group5_sensors3.1 R6_U_cs301_group5_sensors3.1 R8_U_cs301_group5_sensors3.2 | length 278.8
  Top Layer w20: R6_U_cs301_group5_sensors3.1 R8_U_cs301_group5_sensors3.2 5935,-1061.77 5907.6,-1089.18 R5_U_cs301_group5_sensors3.1
Voffset_U_cs301_group5_sensors4: R5_U_cs301_group5_sensors4.1 R6_U_cs301_group5_sensors4.1 R8_U_cs301_group5_sensors4.2 | length 278.8
  Top Layer w20: R6_U_cs301_group5_sensors4.1 R8_U_cs301_group5_sensors4.2 8470,1798.23 8442.6,1770.82 R5_U_cs301_group5_sensors4.1
Voffset_U_cs301_group5_sensors5: R5_U_cs301_group5_sensors5.1 R6_U_cs301_group5_sensors5.1 R8_U_cs301_group5_sensors5.2 | length 278.8
  Top Layer w20: R6_U_cs301_group5_sensors5.1 R8_U_cs301_group5_sensors5.2 10530,1768.23 10502.6,1740.82 R5_U_cs301_group5_sensors5.1
Voffset_U_cs301_group5_sensors6: R5_U_cs301_group5_sensors6.1 R6_U_cs301_group5_sensors6.1 R8_U_cs301_group5_sensors6.2 | length 278.8
  Top Layer w20: R6_U_cs301_group5_sensors6.1 R8_U_cs301_group5_sensors6.2 12580,1788.23 12552.6,1760.82 R5_U_cs301_group5_sensors6.1
pads on no net: D1.K D2.K D3.K J13.1 J13.2 J13.3 J13.4 J13.5 J13.6 J13.7 J13.8 J13.9 J13.10 J18.1 J18.2 J18.3 J18.4 J18.5 J18.6 J18.7 J18.8 J18.9 J18.10 P0.1 P0.2 P0.3 P0.4 P0.5 P0.6 P0.7 P0.8 P1.1 P1.2 P1.4 P2.1 P2.2 P2.3 P2.4 P2.5 P2.6 P2.7 P2.8 P3.1 P3.2 P3.3 P3.4 P3.5 P3.6 P3.7 P3.8 P12.1 P12.2 P12.3 P12.4 P12.5 P12.6 P12.7 P12.8 P15.1 P15.2 P15.3 P15.4 P15.5 P15.6 P15.7 P15.8 U1.5 U1.6 U1.7 U1.12 U1.13 U1.14 U1_U_cs301_group5_sensors2.5 U1_U_cs301_group5_sensors2.6 U1_U_cs301_group5_sensors2.7 U1_U_cs301_group5_sensors2.12 U1_U_cs301_group5_sensors2.13 U1_U_cs301_group5_sensors2.14 U1_U_cs301_group5_sensors3.5 U1_U_cs301_group5_sensors3.6 U1_U_cs301_group5_sensors3.7 U1_U_cs301_group5_sensors3.12 U1_U_cs301_group5_sensors3.13 U1_U_cs301_group5_sensors3.14 U1_U_cs301_group5_sensors4.5 U1_U_cs301_group5_sensors4.6 U1_U_cs301_group5_sensors4.7 U1_U_cs301_group5_sensors4.12 U1_U_cs301_group5_sensors4.13 U1_U_cs301_group5_sensors4.14 U1_U_cs301_group5_sensors5.5 U1_U_cs301_group5_sensors5.6 U1_U_cs301_group5_sensors5.7 U1_U_cs301_group5_sensors5.12 U1_U_cs301_group5_sensors5.13 U1_U_cs301_group5_sensors5.14 U1_U_cs301_group5_sensors6.5 U1_U_cs301_group5_sensors6.6 U1_U_cs301_group5_sensors6.7 U1_U_cs301_group5_sensors6.12 U1_U_cs301_group5_sensors6.13 U1_U_cs301_group5_sensors6.14

## Polygon pours and split planes (outlines as drawn)
V_GND_U_cs301_group5_sensors1 on Bottom Layer "V_GND_U_CS301_GROUP5_SENSORS1_L02_P007" (solid, pour order 7): 3545,2400 3545,1020 4855,1020 4855,2400
V_GND_U_cs301_group5_sensors1 on Bottom Layer "V_GND_U_CS301_GROUP5_SENSORS1_L02_P006" (solid, pour order 6): 2310,-330 2310,-1710 3620,-1710 3620,-330
V_GND_U_cs301_group5_sensors1 on Bottom Layer "V_GND_U_CS301_GROUP5_SENSORS1_L02_P005" (solid, pour order 5): 4755,-350 4755,-1730 6065,-1730 6065,-350
V_GND_U_cs301_group5_sensors1 on Bottom Layer "V_GND_U_CS301_GROUP5_SENSORS1_L02_P004" (solid, pour order 4): 7290,2510 7290,1130 8600,1130 8600,2510
V_GND_U_cs301_group5_sensors1 on Bottom Layer "V_GND_U_CS301_GROUP5_SENSORS1_L02_P003" (solid, pour order 3): 9350,2480 9350,1100 10660,1100 10660,2480
V_GND_U_cs301_group5_sensors1 on Bottom Layer "V_GND_U_CS301_GROUP5_SENSORS1_L02_P002" (solid, pour order 2): 11400,2500 11400,1120 12710,1120 12710,2500
V_VCC_U_cs301_group5_sensors1 on Top Layer "V_VCC_U_CS301_GROUP5_SENSORS1_L01_P013" (solid, pour order 13): 3545,2840 3545,1020 4855,1020 4855,2400 4005,2400 4005,2840
V_VCC_U_cs301_group5_sensors1 on Top Layer "V_VCC_U_CS301_GROUP5_SENSORS1_L01_P012" (solid, pour order 12): 2310,110 2310,-1710 3620,-1710 3620,-330 2770,-330 2770,110
V_VCC_U_cs301_group5_sensors1 on Top Layer "V_VCC_U_CS301_GROUP5_SENSORS1_L01_P011" (solid, pour order 11): 4755,90 4755,-1730 6065,-1730 6065,-350 5215,-350 5215,90
V_VCC_U_cs301_group5_sensors1 on Top Layer "V_VCC_U_CS301_GROUP5_SENSORS1_L01_P010" (solid, pour order 10): 7290,2950 7290,1130 8600,1130 8600,2510 7750,2510 7750,2950
V_VCC_U_cs301_group5_sensors1 on Top Layer "V_VCC_U_CS301_GROUP5_SENSORS1_L01_P009" (solid, pour order 9): 9350,2920 9350,1100 10660,1100 10660,2480 9810,2480 9810,2920
V_VCC_U_cs301_group5_sensors1 on Top Layer "V_VCC_U_CS301_GROUP5_SENSORS1_L01_P008" (solid, pour order 8): 11400,2940 11400,1120 12710,1120 12710,2500 11860,2500 11860,2940

## Keep-outs
Keep-Out Layer:
  lines w10: -1730,-2500 1730,-2500 1730,2500 -1730,2500 -1730,-2500

## Other copper
Top Layer:
  text "TODO: / - Reduce size by revising design to use 2 sensors per opamp/room / - Hook up VCC and GND" at 1830,3370 h60

## Silkscreen, mask and mechanical layers (free items; w line width, h text height)
Top Overlay:
  text "Front" at -228.11,2113.31 h100
  text "Put your design here" at -920,1620 h100
  text "3.1" at -915,1190 h40
  text "3.0" at -1275,1180 h40
  text "3.2" at -1270,1090 h40
  text "3.3" at -920,1090 h40
  text "3.5" at -920,990 h40
  text "3.4" at -1270,980 h40
  text "1.7" at 855,915 h40
  text "3.7" at -930,895 h40
  text "3.6" at -1280,860 h40
  text "1.6" at 1170,840 h40
  text "1.5" at 810,730 h40
  text "1.4" at 1165,730 h40
  text "Ibat" at -1290,710 h40
  text "Vbat" at -910,700 h40
  text "1.3" at 815,630 h40
  text "1.2" at 1170,625 h40
  text "D1" at -1220,605 h40
  text "IN2" at -915,600 h40
  text "1.1" at 825,525 h40
  text "1.0" at 1170,525 h40
  text "IN1" at -1260,510 h40
  text "SLW" at -915,505 h40
  text "INV" at -1275,405 h40
  text "EN" at -915,400 h40
  text "ENCD" at 1170,330 h40
  text "ENCD" at 765,325 h40
  text "D2" at -1240,300 h40
  text "D2" at 1165,215 h40
  text "EN" at 835,130 h40
  text "INV" at 1165,125 h40
  text "15.1" at -920,115 h40
  text "15.0" at -1305,100 h40
  text "SLW" at 805,30 h40
  text "IN1" at 1170,25 h40
  text "15.2" at -1305,15 h40
  text "15.3" at -920,10 h40
  text "IN2" at 815,-75 h40
  text "D1" at 1170,-80 h40
  text "15.4" at -1305,-90 h40
  text "15.5" at -920,-90 h40
  text "ENCD" at -1315,-190 h40
  text "ENCD" at -920,-195 h40
  text "12.0" at 780,-265 h40
  text "12.1" at 1160,-270 h40
  text "12.2" at 780,-360 h40
  text "12.3" at 1165,-380 h40
  text "12.4" at 785,-465 h40
  text "12.5" at 1170,-465 h40
  text "12.6" at 775,-565 h40
  text "12.7" at 1175,-565 h40
  text "0.1" at -910,-610 h40
  text "0.0" at -1275,-620 h40
  text "0.2" at -1280,-720 h40
  text "0.3" at -915,-720 h40
  text "2.7" at 795,-720 h40
  text "2.6" at 1170,-755 h40
  text "2.5" at 805,-790 h40
  text "0.5" at -925,-795 h40
  text "0.4" at -1280,-820 h40
  text "2.4" at 1170,-860 h40
  text "0.6" at -1270,-895 h40
  text "0.7" at -925,-960 h40
  text "2.3" at 795,-970 h40
  text "2.2" at 1170,-970 h40
  text "2.1" at 815,-1060 h40
  text "2.0" at 1165,-1070 h40
  text "-" at -1195,-1230 h60 r180
  text "-" at -850,-1230 h60 r180
  text "-" at 900,-1230 h60 r180
  text "-" at 1215,-1230 h60 r180
  text "+" at -1185,-1380 h60 r90
  text "+" at 910,-1380 h60 r90
  text "+" at -850,-1390 h60 r90
  text "+" at 1225,-1390 h60 r90
  text "Don't delete any LED & hole" at -1270,-1620 h100